# Altium PCB Microcontroller.PcbDoc
Units mm, origin at the board's own origin, x right, y up, seen from the top; angles counter-clockwise.
Board outline 26 x 30 mm, 2 copper layers (F.Cu, B.Cu); 34 components, 38 nets, 165 pads, 110 vias.
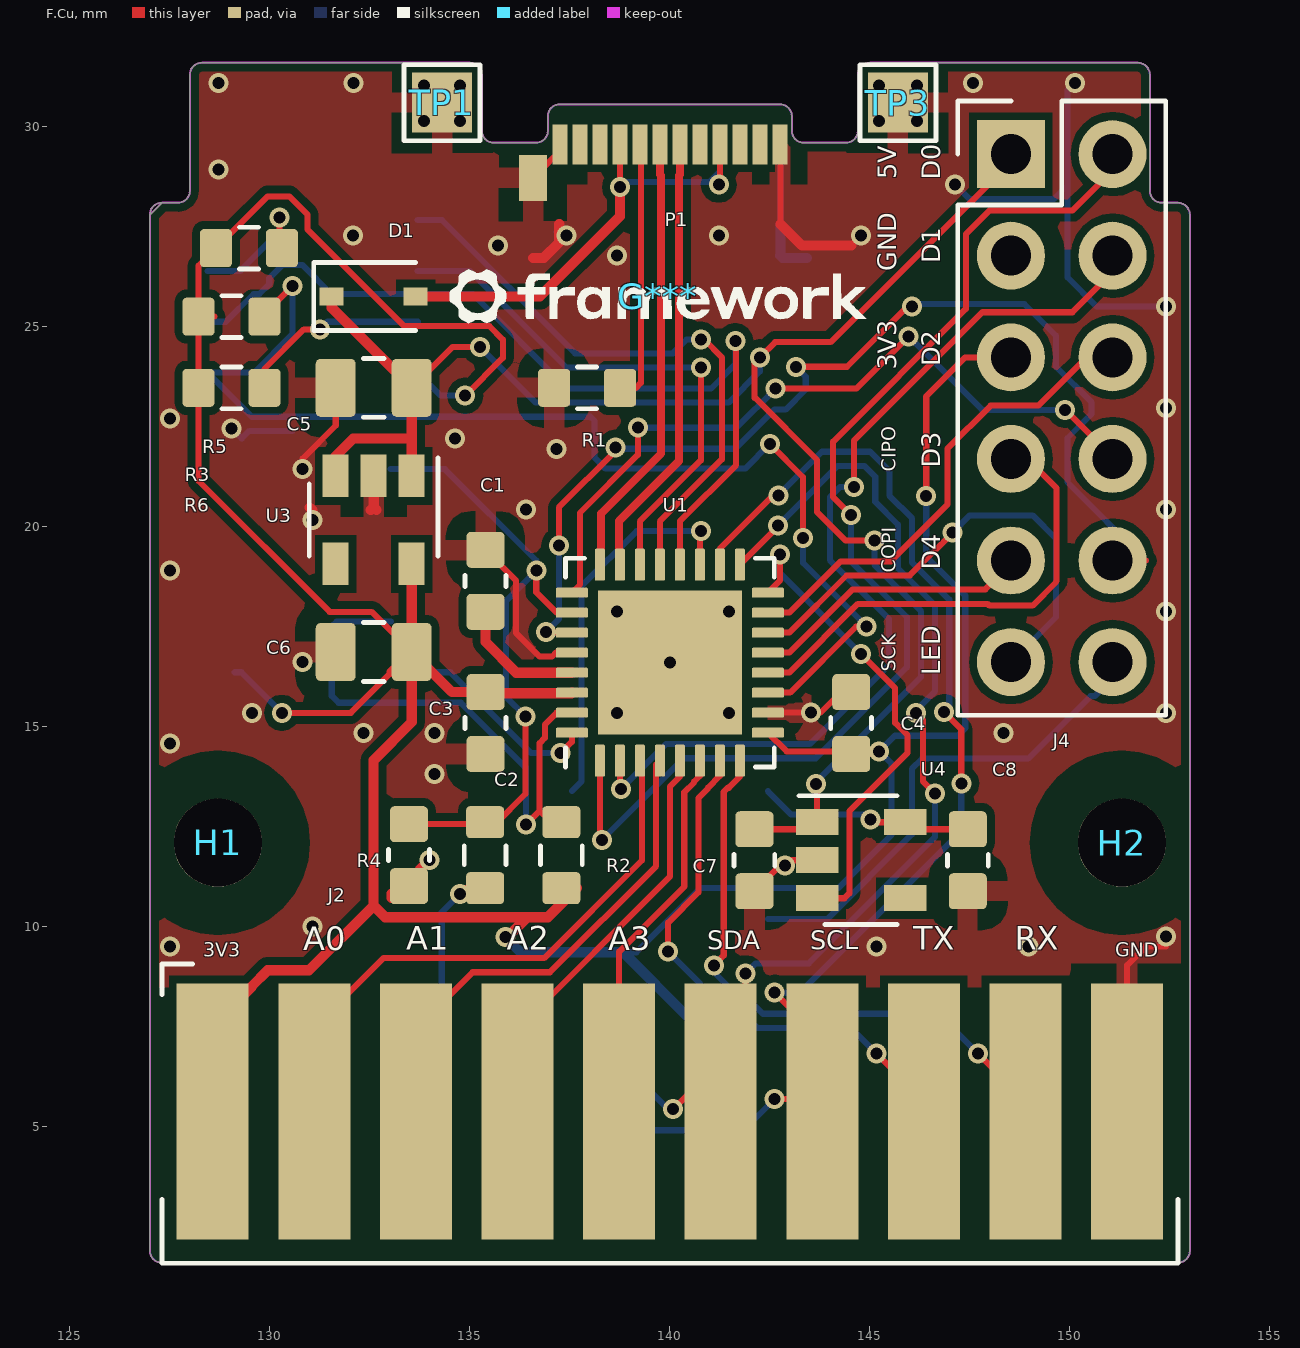
[diagram p0: F.Cu view]
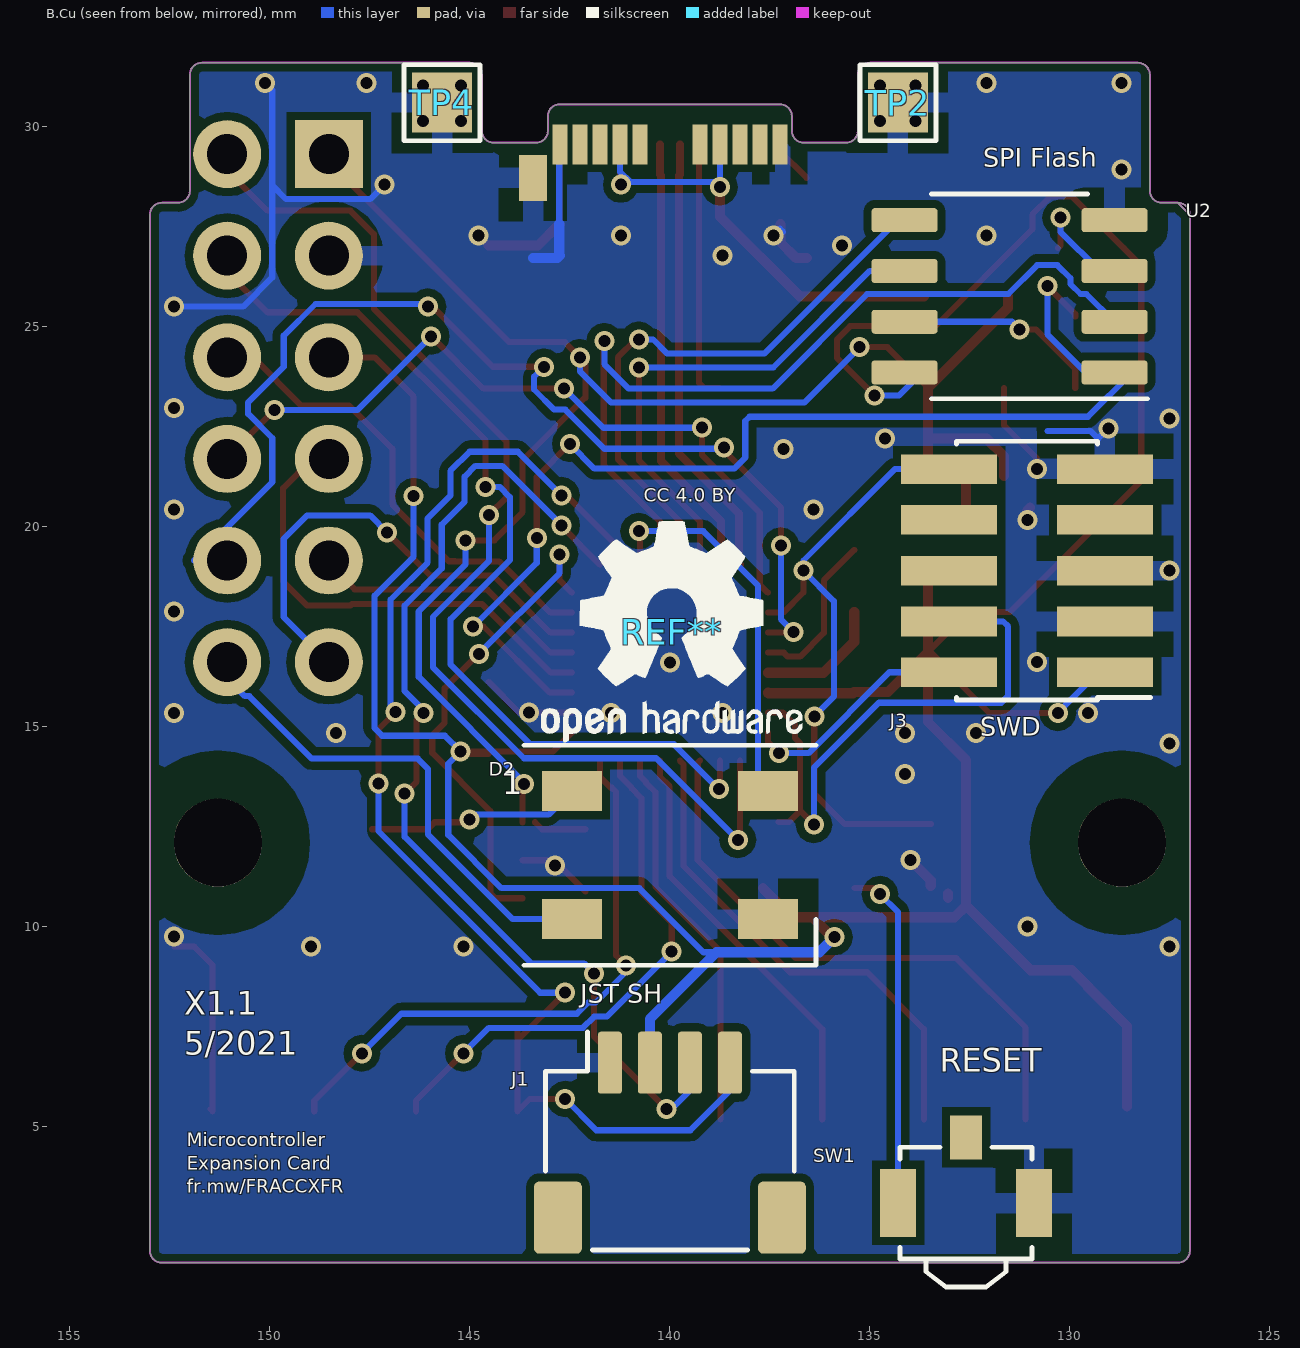
[diagram p1: B.Cu view, seen from below]

## Layer stack, top to bottom
F.Mask: solder mask 0.0102, Solder Resist, Dk 3.5
F.Cu: signal copper 0.0356
Dielectric 1: dielectric 0.32, FR-4, Dk 4.8
B.Cu: signal copper 0.0356
B.Mask: solder mask 0.0102, Solder Resist, Dk 3.5

## Board outline
127.3,28.086 ccw(c127.3,27.786) 127,27.786 127,1.886 ccw(c127.3,1.886) 127.3,1.586 152.7,1.586 ccw(c152.7,1.886) 153,1.886 153,27.786 ccw(c152.7,27.786) 152.3,28.086 cw(c152.3,28.386) 152,28.386 152,31.286 ccw(c151.7,31.286) 151.7,31.586 145,31.586 ccw(c145,31.286) 144.7,31.286 144.7,29.886 cw(c144.4,29.886) 144.3,29.586 143.35,29.586 cw(c143.35,29.886) 143.05,29.886 143.05,30.246 ccw(c142.75,30.246) 142.75,30.546 137.25,30.546 ccw(c137.25,30.246) 136.95,30.246 136.95,29.886 cw(c136.65,29.886) 136.65,29.586 135.7,29.586 135.6,29.586 cw(c135.6,29.886) 135.3,29.886 135.3,31.286 ccw(c135,31.286) 135,31.586 128.3,31.586 ccw(c128.3,31.286) 128,31.286 128,28.386 cw(c127.7,28.386) 127.7,28.086 127.3,28.086 ccw(c127.3,27.786) 127.3,28.086

## Design rules (kind name [scope] priority, off if disabled: settings)
Clearance "Clearence 1.2_PadClass" [InPadClass('Pad Class Clearance 1.2')] p1: gap=1.2 ignorepadtopadclearanceinfootprint=FALSE
Clearance "Clearence 0.2_NetClass" [InNetClass('Default')] p2: gap=0.2 ignorepadtopadclearanceinfootprint=FALSE
Clearance "Clearence 0.1524_Polygon" [InNamedPolygon('B.Cu-GND') OR InNamedPolygon('F.Cu-GND')] p3: gap=0.152 ignorepadtopadclearanceinfootprint=FALSE
HoleSize "Hole Size (Default)" [All] p1: absolutevalues=TRUE maxlimit=10 minlimit=0 maxpercent=80.000 minpercent=20.000
MinimumSolderMaskSliver [All] p1: minsoldermaskwidth=0
PolygonConnect Polygon_F.Cu-GND_ConnectDirect [IsNamedPolygon('F.Cu-GND') vs IsVia] p1: connectstyle=Direct reliefconductorwidth=0.254 reliefentries=4 polygonreliefangle="90 Angle" airgapwidth=0.254
PolygonConnect Polygon_F.Cu-GND_ConnectRelief45 [IsNamedPolygon('F.Cu-GND') vs (IsThruPin or IsSMTPin) and (PadShape_AllLayers = 'Round')] p2: connectstyle=Relief reliefconductorwidth=0.508 reliefentries=4 polygonreliefangle="45 Angle" airgapwidth=0.508
PolygonConnect Polygon_F.Cu-GND_ConnectRelief90 [IsNamedPolygon('F.Cu-GND') vs (IsThruPin or IsSMTPin) and (PadShape_AllLayers <> 'Round')] p3: connectstyle=Relief reliefconductorwidth=0.508 reliefentries=4 polygonreliefangle="90 Angle" airgapwidth=0.508
PolygonConnect Polygon_B.Cu-GND_ConnectDirect [IsNamedPolygon('B.Cu-GND') vs IsVia] p4: connectstyle=Direct reliefconductorwidth=0.254 reliefentries=4 polygonreliefangle="90 Angle" airgapwidth=0.254
PolygonConnect Polygon_B.Cu-GND_ConnectRelief45 [IsNamedPolygon('B.Cu-GND') vs (IsThruPin or IsSMTPin) and (PadShape_AllLayers = 'Round')] p5: connectstyle=Relief reliefconductorwidth=0.508 reliefentries=4 polygonreliefangle="45 Angle" airgapwidth=0.508
PolygonConnect Polygon_B.Cu-GND_ConnectRelief90 [IsNamedPolygon('B.Cu-GND') vs (IsThruPin or IsSMTPin) and (PadShape_AllLayers <> 'Round')] p6: connectstyle=Relief reliefconductorwidth=0.508 reliefentries=4 polygonreliefangle="90 Angle" airgapwidth=0.508
RoutingVias [All] p1: holewidth=0.711 width=1.27 viastyle="Through Hole" minholewidth=0.711 minwidth=1.27 maxholewidth=0.711 maxwidth=1.27
SilkToSilkClearance [All] p1: silktosilkclearance=0
SilkToSolderMaskClearance [IsPad] p1: minsilkscreentomaskgap=0 clearancetoexposedcopper=TRUE
SolderMaskExpansion [All] p1: expansion=0.102 istentingtop=FALSE
Width [All] p1: maxlimit=10 minlimit=0.152 preferedwidth=0.25 minimp=50.000000 maximp=50.000000 favimp=50.000000
26 further rules are at their usual default settings.

## Classes and differential pairs
pad class "Pad Class Clearance 1.2": H1-Un1 H2-Un1
net class Default: +3.6V +3V3 A0 A1 A2 A3 CIPO COPI D0 D1 D2 D3 D4 FLASH_CIPO FLASH_CLK FLASH_COPI FLASH_CS GND LED_EN LED_IN LED_OUT Net-(C1-Pad1) Net-(C2-Pad1) Net-(D1-Pad2) Net-(P1-PadA5) Net-(R4-Pad1) Net-(R5-Pad2) Net-(R6-Pad2) RX_A7 SCK SCL SDA SWCLK SWDIO TX_A6 USB_DN USB_DP VBUS

## Components (designator, comment, footprint, x,y, rotation, side; value= is the part's Value field where it differs from the comment)
C1 "1uF" C_0603_1608Metric 135.39,18.632 r90 top
C2 "100nF" C_0603_1608Metric 133.477,11.774 r270 top
C3 "100nF" C_0603_1608Metric 135.39,15.076 r270 top
C4 "100nF" C_0603_1608Metric 144.534,15.076 r90 top
C5 "10uF" C_0805_2012Metric 132.596,23.458 r180 top
C6 "10uF" C_0805_2012Metric 132.596,16.854 r180 top
C7 "1uF" C_0603_1608Metric 142.113,11.647 r270 top
C8 "1uF" C_0603_1608Metric 147.447,11.647 r270 top
D1 "BAT20JFILM" D_SOD-323 132.596,25.744 r0 top
D2 "WS2812B" LED_WS2812B_PLCC4_5.0x5.0mm_P3.2mm 140,11.774 r0 bottom
G*** "LOGO" Framework-Logo_1.5mm_SilkScreen 139.7,25.744 r0 top
H1 "MountingHole" MountingHole_2.2mm_M2 128.7,12.086 r0 top
H2 "MountingHole" MountingHole_2.2mm_M2 151.3,12.086 r0 top
J1 "JST SH 1x4" JST_SH_SM04B-SRSS-TB_1x04-1MP_P1.00mm_Horizontal 140,4.586 r0 bottom
J2 "Conn_01x10" PinSocket_8FM-78-0010-02-146_1x10_P2.54mm_Horizontal_SMD 140,5.37 r0 top
J3 "Conn_ARM_JTAG_SWD_10" PinHeader_2x05_P1.27mm_Vertical_SMD 131.072,18.886 r180 bottom
J4 "Conn_02x06_Odd_Even" PinHeader_2x06_P2.54mm_Vertical 148.526,29.3 r0 top
P1 "USB_C_Plug_USB2.0" USB_C_Plug_Molex_105444 140,29.586 r0 top
R1 "5.1k" R_0603_1608Metric 137.93,23.458 r180 top
R2 "1k" R_0603_1608Metric 137.287,11.774 r90 top
R3 "5.1k" R_0603_1608Metric 129.04,25.236 r0 top
R4 "5.1k" R_0603_1608Metric 135.382,11.774 r90 top
R5 "5.1k" R_0603_1608Metric 129.476,26.95 r0 top
R6 "5.1k" R_0603_1608Metric 129.04,23.458 r0 top
REF** "OSHW-Logo2_7.3x6mm_SilkScreen" OSHW-Logo2_7.3x6mm_SilkScreen 139.954,17.362 r0 bottom
SW1 "RESET" SW_SPST_B3U-3100P 132.596,3.9 r180 bottom
TP1 "TestPoint" TestPoint_Pad_1.5x1.5mm 134.3,30.586 r0 top
TP2 "TestPoint" TestPoint_Pad_1.5x1.5mm 134.3,30.586 r0 bottom
TP3 "TestPoint" TestPoint_Pad_1.5x1.5mm 145.7,30.586 r0 top
TP4 "TestPoint" TestPoint_Pad_1.5x1.5mm 145.7,30.586 r0 bottom
U1 "ATSAMD21E18A-M" QFN-32-1EP_5x5mm_P0.5mm_EP3.6x3.6mm 140,16.586 r90 top
U2 "GD25Q16CT" SOP-8_3.9x4.9mm_P1.27mm 131.508,25.744 r180 bottom
U3 "AP2112K-3.3" SOT-23-5 132.596,20.156 r270 top
U4 "TLV70036_SOT23-5" SOT-23-5 144.78,11.647 r0 top

## Footprints (in the part's own frame and the unit in brackets; to place one, negate y for a bottom-side part, rotate by r counter-clockwise, add the part's x,y. Pads: shape width x height; smd on the part's side, far side on the other; paste and mask are expansions set on the pad)
C_0603_1608Metric [mm]
  rrect25% 0.9x0.95 smd mask+0: 1(-0.775,0) 2(0.775,0)
  silkscreen extent -0.14,-0.51 0.14,0.51
C_0805_2012Metric [mm]
  rrect25% 1x1.45 smd mask+0: 1(-0.95,0) 2(0.95,0)
  silkscreen extent -0.26,-0.73 0.26,0.73
D_SOD-323 [mm]
  rect 0.6x0.45 smd mask+0: 1(-1.05,0) 2(1.05,0)
  silkscreen extent -1.5,-0.85 1.05,0.85
Framework-Logo_1.5mm_SilkScreen [mm]
  silkscreen extent -5.21,-0.68 5.21,0.68
JST_SH_SM04B-SRSS-TB_1x04-1MP_P1.00mm_Horizontal [mm]
  rrect25% 0.6x1.55 smd mask+0: 1(1.5,-2) 2(0.5,-2) 3(-0.5,-2) 4(-1.5,-2)
  rrect21% 1.2x1.8 smd mask+0: MP(-2.8,1.875) MP(2.8,1.875)
  silkscreen extent -3.11,-2.78 3.11,2.69
LED_WS2812B_PLCC4_5.0x5.0mm_P3.2mm [mm]
  rect 1.5x1 smd mask+0: 1(2.45,-1.6) 2(2.45,1.6) 3(-2.45,1.6) 4(-2.45,-1.6)
  silkscreen extent -3.65,-2.75 3.65,2.75
MountingHole_2.2mm_M2 [mm]
  round 2.2 hole 2.2 paste-2539.97 mask+0: Un1(0,0)
OSHW-Logo2_7.3x6mm_SilkScreen [mm]
  silkscreen extent -3.27,-2.76 3.27,2.77
PinHeader_2x05_P1.27mm_Vertical_SMD [mm]
  rect 2.4x0.74 smd mask+0: 1(1.95,-2.54) 2(-1.95,-2.54) 3(1.95,-1.27) 4(-1.95,-1.27) 5(1.95,0) 6(-1.95,0) 7(1.95,1.27) 8(-1.95,1.27) 9(1.95,2.54) 10(-1.95,2.54)
  silkscreen extent -1.77,-3.23 3.09,3.23
PinHeader_2x06_P2.54mm_Vertical [mm]
  rect 1.7x1.7 hole 1 paste-2539.97 mask+0: 1(0,0)
  rrect100% 1.7x1.7 hole 1 paste-2539.97 mask+0: 2(2.54,0) 3(0,-2.54) 4(2.54,-2.54) 5(0,-5.08) 6(2.54,-5.08) 7(0,-7.62) 8(2.54,-7.62) 9(0,-10.16) 10(2.54,-10.16) 11(0,-12.7) 12(2.54,-12.7)
  silkscreen extent -1.33,-14.03 3.87,1.33
PinSocket_8FM-78-0010-02-146_1x10_P2.54mm_Horizontal_SMD [mm]
  rect 1.8x6.4 smd mask+0: 1(-11.43,0) 2(-8.89,0) 3(-6.35,0) 4(-3.81,0) 5(-1.27,0) 6(1.27,0) 7(3.81,0) 8(6.35,0) 9(8.89,0) 10(11.43,0)
  silkscreen extent -12.7,-3.8 12.7,3.68
QFN-32-1EP_5x5mm_P0.5mm_EP3.6x3.6mm [mm]
  rrect25% 0.8x0.25 smd mask+0: 1(-2.45,1.75) 2(-2.45,1.25) 3(-2.45,0.75) 4(-2.45,0.25) 5(-2.45,-0.25) 6(-2.45,-0.75) 7(-2.45,-1.25) 8(-2.45,-1.75) 17(2.45,-1.75) 18(2.45,-1.25) 19(2.45,-0.75) 20(2.45,-0.25) 21(2.45,0.25) 22(2.45,0.75) 23(2.45,1.25) 24(2.45,1.75)
  rrect25% 0.25x0.8 smd mask+0: 9(-1.75,-2.45) 10(-1.25,-2.45) 11(-0.75,-2.45) 12(-0.25,-2.45) 13(0.25,-2.45) 14(0.75,-2.45) 15(1.25,-2.45) 16(1.75,-2.45) 25(1.75,2.45) 26(1.25,2.45) 27(0.75,2.45) 28(0.25,2.45) 29(-0.25,2.45) 30(-0.75,2.45) 31(-1.25,2.45) 32(-1.75,2.45)
  rect 3.6x3.6 smd paste-3.6 mask+0: 33(0,0)
  rrect25% 0.97x0.97 on Top Paste mask-0.97: Un1(1.2,-1.2) Un2(1.2,0) Un3(1.2,1.2) Un4(0,-1.2) Un5(0,0) Un6(0,1.2) Un7(-1.2,-1.2) Un8(-1.2,0) Un9(-1.2,1.2)
  silkscreen extent -2.61,-2.61 2.61,2.61
R_0603_1608Metric [mm]
  rrect25% 0.8x0.95 smd mask+0: 1(-0.825,0) 2(0.825,0)
  silkscreen extent -0.24,-0.52 0.24,0.52
SOP-8_3.9x4.9mm_P1.27mm [mm]
  rrect25% 1.65x0.6 smd mask+0: 1(2.625,-1.905) 2(2.625,-0.635) 3(2.625,0.635) 4(2.625,1.905) 5(-2.625,1.905) 6(-2.625,0.635) 7(-2.625,-0.635) 8(-2.625,-1.905)
  silkscreen extent -1.95,-2.56 3.45,2.56
SOT-23-5 [mm]
  rect 1.06x0.65 smd mask+0: 1(-1.1,0.95) 2(-1.1,0) 3(-1.1,-0.95) 4(1.1,-0.95) 5(1.1,0.95)
  silkscreen extent -1.55,-1.61 0.9,1.61
SW_SPST_B3U-3100P [mm]
  rect 0.9x1.7 smd mask+0: 1(1.7,-0.82) 2(-1.7,-0.82)
  rect 0.8x1.1 smd mask+0: 3(0,0.82)
  silkscreen extent -1.65,-2.92 1.65,0.57
TestPoint_Pad_1.5x1.5mm [mm]
  rect 1.5x1.5 smd paste-1.5 mask+0: 1(0,0)
  silkscreen extent -0.95,-0.95 0.95,0.95
USB_C_Plug_Molex_105444 [mm]
  rect 0.38x1 smd mask+0: A1(-2.75,-0.04) A2(-2.25,-0.04) A3(-1.75,-0.04) A4(-1.25,-0.04) A5(-0.75,-0.04) A6(-0.25,-0.04) A7(0.25,-0.04) A8(0.75,-0.04) A9(1.25,-0.04) A10(1.75,-0.04) A11(2.25,-0.04) A12(2.75,-0.04)
  rect 0.38x1 smd far side mask+0: B1(2.75,-0.04) B2(2.25,-0.04) B3(1.75,-0.04) B4(1.25,-0.04) B5(0.75,-0.04) B8(-0.75,-0.04) B9(-1.25,-0.04) B10(-1.75,-0.04) B11(-2.25,-0.04) B12(-2.75,-0.04)
  rect 0.7x1.15 smd mask+0: S1(-3.42,-0.88)
  rect 0.7x1.15 smd far side mask+0: S1(3.42,-0.88)

## Part data
C1 C2 C3 C4 C7 C8: library part C_0603_1608Metric, "Capacitor SMD 0603 (1608 Metric), square (rectangular) end terminal, IPC_7351 nominal, (Body size source: IPC-SM-782 page 76, https://www.pcb-3d.com/wordpress/wp-content/uploads/ipc-sm-782a_amendment_1_and_2.pdf), generated with kicad-footprint-generator"
C5 C6: library part C_0805_2012Metric, "Capacitor SMD 0805 (2012 Metric), square (rectangular) end terminal, IPC_7351 nominal, (Body size source: IPC-SM-782 page 76, https://www.pcb-3d.com/wordpress/wp-content/uploads/ipc-sm-782a_amendment_1_and_2.pdf, https://docs.google.com/spreadsheets/d/1BsfQQcO9C6DZCsRaXUlFlo91Tg2WpOkGARC1WS5S8t0/edit?usp=sharing), generated with kicad-footprint-generator"
D1: library part D_SOD-323, "SOD-323"
D2: library part LED_WS2812B_PLCC4_5.0x5.0mm_P3.2mm, "https://cdn-shop.adafruit.com/datasheets/WS2812B.pdf"
G***: library part Framework-Logo_1.5mm_SilkScreen
H1 H2: library part MountingHole_2.2mm_M2, "Mounting Hole 2.2mm, no annular, M2"
J1: library part JST_SH_SM04B-SRSS-TB_1x04-1MP_P1.00mm_Horizontal, "JST SH series connector, SM04B-SRSS-TB (http://www.jst-mfg.com/product/pdf/eng/eSH.pdf), generated with kicad-footprint-generator"
J2: library part PinSocket_8FM-78-0010-02-146_1x10_P2.54mm_Horizontal_SMD
J3: library part PinHeader_2x05_P1.27mm_Vertical_SMD, "surface-mounted straight pin header, 2x05, 1.27mm pitch, double rows"
J4: library part PinHeader_2x06_P2.54mm_Vertical, "Through hole straight pin header, 2x06, 2.54mm pitch, double rows"
P1: library part USB_C_Plug_Molex_105444, "Universal Serial Bus (USB) Shielded I/O Plug, Type C, Right Angle, Surface Mount, http://www.molex.com/pdm_docs/sd/1054440001_sd.pdf"
R1 R2 R3 R4 R5 R6: library part R_0603_1608Metric, "Resistor SMD 0603 (1608 Metric), square (rectangular) end terminal, IPC_7351 nominal, (Body size source: IPC-SM-782 page 72, https://www.pcb-3d.com/wordpress/wp-content/uploads/ipc-sm-782a_amendment_1_and_2.pdf), generated with kicad-footprint-generator"
REF**: "Open Source Hardware Symbol"
SW1: library part SW_SPST_B3U-3100P, "Ultra-small-sized Tactile Switch with High Contact Reliability, Side-actuated Model, with Ground Terminal, without Boss"
TP1 TP2 TP3 TP4: library part TestPoint_Pad_1.5x1.5mm, "SMD rectangular pad as test Point, square 1.5mm side length"
U1: library part QFN-32-1EP_5x5mm_P0.5mm_EP3.6x3.6mm, "QFN, 32 Pin (http://infocenter.nordicsemi.com/pdf/nRF52810_PS_v1.1.pdf#page=468), generated with kicad-footprint-generator ipc_noLead_generator.py"
U2: library part SOP-8_3.9x4.9mm_P1.27mm, "SOP, 8 Pin (http://www.macronix.com/Lists/Datasheet/Attachments/7534/MX25R3235F,%20Wide%20Range,%2032Mb,%20v1.6.pdf#page=79), generated with kicad-footprint-generator ipc_gullwing_generator.py"
U3 U4: library part SOT-23-5, "5-pin SOT23 package"

## Via types
v1: diameter 0.5, hole 0.3, F.Cu to B.Cu, tented both sides, 110 vias

## Nets (pads, with @x,y where several pads share a name; then routed paths per layer and width w, separated by ;. In a path a pad name is that pad's centre, name@x,y a point inside that pad or via, vN(x,y) a via of type N, cw(c..) or ccw(c..) an arc to the next point about the centre after c; other vN are vias at no path point)
+3.6V: C8.1 D2.1 U4.5 | length 5.4
  F.Cu w0.152: v1(145.014,12.661) 145.078,12.597 U4.5 146.055,12.422 C8.1
  B.Cu w0.152: D2.1 143.034,12.79 144.885,12.79 v1(145.014,12.661)
+3V3: C3.1 C4.1 C6.1 J1.2 J2.1 J3.1 J4.5 R2.1 R3.1 R5.1 R6.1 U1.9 U1.30 U2.8 U3.5 | length 96.5
  F.Cu w0.152: R3.1@128.615,25.236 R3.1 ; v1(130.302,15.33) 132.022,15.33 C6.1 132.545,17.855 131.495,17.855 128.215,21.135 R6.1 R3.1 ; v1(134.882,23.261) 135.826,24.206 135.826,24.664 135.491,25 133.359,25 130.937,27.423 130.937,27.793 130.491,28.239 129.94,28.239 R5.1 128.215,26.514 R3.1 ; U1.9 142.917,14.369 v1(145.233,14.369) 145.166,14.301 C4.1 ; v1(146.408,20.75) 146.408,23.245 147.383,24.22 J4.5@148.936,24.22
  F.Cu w0.254: J2.1@128.57,5.497 128.57,7.502 129.54,8.472 129.54,8.489 129.948,8.897 130.977,8.897 132.593,10.513 ; C6.1@133.047,16.355 C6.1 ; U3.5 C6.1 ; 133.641,10.222 136.434,10.222 ; v1(135.89,9.725) 135.937,9.725 136.434,10.222 ; U1.30 137.537,15.823 135.418,15.823 C3.1 134.549,15.851 C6.1 ; R2.1@137.676,10.949 136.949,10.222 136.553,10.222 ; 132.593,10.513 132.593,14.149 133.546,15.102 C6.1 ; 132.593,10.513 132.884,10.222 136.553,10.222 ; 136.434,10.222 136.553,10.222
  B.Cu w0.152: J3.1 129.286,16.346 v1(130.302,15.33) ; U2.8@133.697,23.839 134.275,23.261 v1(134.882,23.261) ; 138.833,9.347 139.161,9.347 140.764,10.95 144.21,10.95 145.542,12.282 145.542,14.06 v1(145.233,14.369) 145.623,14.758 147.193,14.758 147.383,14.949 147.383,18.261 146.408,19.236 v1(146.408,20.75)
  B.Cu w0.254: v1(135.89,9.725) 136.14,9.475 136.268,9.347 138.833,9.347 140.5,7.68 J1.2@140.5,6.662
A0: J2.2 U1.3 | length 14.7
  F.Cu w0.152: J2.2@131.11,5.17 131.11,7.47 132.839,9.199 136.854,9.199 139.302,11.647 139.302,14.084 U1.3
A1: J2.3 U1.4 | length 12.6
  F.Cu w0.152: J2.3@133.65,5.17 133.65,7.427 135.069,8.846 137,8.846 139.655,11.501 139.655,14.041 U1.4
A2: J2.4 U1.5 | length 12.6
  F.Cu w0.152: J2.4@136.19,5.17 J2.4@136.19,7.318 ; J2.4 136.19,7.427 140.007,11.244 140.007,13.493 140.25,13.736 U1.5
A3: J2.5 U1.6 | length 9.8
  F.Cu w0.152: J2.5@138.73,5.17 138.73,9.359 140.36,10.989 140.36,13.347 140.602,13.59 140.602,13.609 140.75,13.757 U1.6
CIPO: J4.7 U1.12 | length 11.6
  F.Cu w0.152: U1.12 142.983,16.336 144.701,18.054 147.939,18.054 147.942,18.057 147.986,18.014 149.067,18.014 149.653,18.599 149.653,18.615 149.669,18.632 149.669,20.946 J4.7@148.936,21.68
COPI: J4.9 U1.13 | length 7.4
  F.Cu w0.152: U1.13 142.985,16.836 144.562,18.413 145.655,18.413 145.659,18.417 147.884,18.417 148.607,19.14 J4.9@148.936,19.14
D0: J4.2 U1.1 | length 29.3
  F.Cu w0.152: U1.1 138.25,12.208 v1(138.303,12.155) ; v1(144.526,20.283) 144.082,20.727 144.082,22.115 147.4,25.434 147.4,27.301 147.986,27.886 150.062,27.886 J4.2@151.476,29.3
  B.Cu w0.152: v1(138.303,12.155) 140.345,14.197 143.647,14.197 145.923,16.473 145.923,17.728 144.526,19.125 v1(144.526,20.283)
D1: J4.4 U1.2 | length 24.2
  F.Cu w0.152: U1.2 138.75,13.451 v1(138.776,13.425) ; v1(144.608,20.981) 144.608,22.143 147.811,25.346 150.062,25.346 J4.4@151.476,26.76
  B.Cu w0.152: v1(138.776,13.425) 139.901,14.55 143.492,14.55 145.48,16.538 145.48,17.672 144,19.152 144,20.727 144.254,20.981 v1(144.608,20.981)
D2: J4.6 U1.15 | length 12.5
  F.Cu w0.152: U1.15 142.988,17.836 144.27,19.118 145.363,19.118 145.367,19.122 145.524,19.122 146.939,20.537 146.939,21.934 148.018,23.013 149.21,23.013 150.417,24.22 J4.6@151.476,24.22
D3: J4.8 U1.25 | length 19
  F.Cu w0.152: U1.25 137.753,18.539 137.753,20.333 139.2,21.779 v1(139.2,22.46) ; v1(142.641,23.438) 144.66,23.438 v1(145.968,24.746) ; v1(149.882,22.906) 151.108,21.68 J4.8@151.138,21.68
  B.Cu w0.152: v1(139.2,22.46) 141.664,22.46 v1(142.641,23.438) ; v1(145.968,24.746) 147.808,22.906 v1(149.882,22.906)
D4: J4.10 U1.27 | length 27.3
  F.Cu w0.152: v1(136.907,17.355) 136.927,17.336 U1.27 ; v1(137.227,19.512) 137.227,20.469 138.642,21.884 v1(138.642,21.966) ; v1(143.147,23.984) 144.428,23.984 145.934,25.49 v1(146.05,25.49) ; J4.10@151.198,19.14 J4.10@151.9,19.14
  B.Cu w0.152: v1(136.907,17.355) 137.227,17.675 v1(137.227,19.512) ; v1(138.642,21.966) 138.674,21.934 141.636,21.934 142.613,22.912 142.894,22.912 143.397,23.415 143.397,23.734 v1(143.147,23.984) ; v1(146.05,25.49) 146.113,25.553 148.86,25.553 149.653,24.761 149.653,23.984 150.543,23.094 150.543,22.806 149.94,22.204 149.94,21.1 J4.10@151.9,19.14
FLASH_CIPO: U1.20 U2.2 | length 22.1
  F.Cu w0.152: U1.20 140.25,20.121 141.654,21.525 141.654,24.61 v1(141.638,24.626)
  B.Cu w0.152: U2.2@128.447,25.109 128.896,25.109 129.59,25.803 129.735,25.803 129.985,26.052 129.985,26.197 130.311,26.524 130.817,26.524 131.538,25.803 135.069,25.803 137.432,23.44 141.028,23.44 141.638,24.05 v1(141.638,24.626)
FLASH_CLK: U1.22 U2.6 | length 13.6
  F.Cu w0.152: U1.22 139.25,20.118 140.775,21.643 v1(140.775,23.966)
  B.Cu w0.152: U2.6@133.697,26.379 135.001,26.379 137.414,23.966 v1(140.775,23.966)
FLASH_COPI: U1.21 U2.5 | length 15.1
  F.Cu w0.152: U1.21 139.75,20.119 141.301,21.671 141.301,24.219 140.854,24.666 v1(140.775,24.666)
  B.Cu w0.152: U2.5@133.697,27.649 134.302,27.649 137.633,24.318 140.074,24.318 140.421,24.666 v1(140.775,24.666)
FLASH_CS: R3.2 U1.11 U2.1 | length 29.3
  F.Cu w0.152: R3.2 129.865,25.299 v1(130.564,25.998) ; U1.11 143.005,15.836 144.66,17.491 v1(144.917,17.491) ; v1(142.5,22.055) 143.328,21.227 v1(143.328,19.699)
  B.Cu w0.152: v1(130.564,25.998) 130.564,24.8 129.603,23.839 128.447,23.839 129.551,22.735 138.009,22.735 138.116,22.628 138.116,21.713 138.39,21.439 141.885,21.439 v1(142.5,22.055) ; v1(143.328,19.699) 143.328,19.08 v1(144.917,17.491)
GND: C1.2 C2.2 C3.2 C4.2 C5.2 C6.2 C7.2 C8.2 D2.3 J1.1 J2.10 J3.3 J3.5 J3.9 J4.3 P1.A1 P1.A12 P1.B1 P1.B12 P1.S1 R1.2 SW1.1 TP1.1 TP2.1 TP3.1 TP4.1 U1.10 U1.28 U1.33 U2.4 U3.2 U4.2 | length 42.6
  F.Cu w0.152: v1(130.818,21.426) 130.818,21.688 131.646,22.516 C5.2 ; C1.2 136.152,18.645 136.152,17.332 136.745,16.739 137.053,16.739 137.15,16.836 U1.28 ; P1.S1@136.58,28.706 137.25,29.376 P1.A1 P1.A1@137.233,29.529 ; C7.2 142.761,11.52 v1(142.875,11.52) 143.002,11.647 U4.2 ; U1.10 v1(143.524,15.336) 143.765,15.336 C4.2@144.534,16.105 ; P1.A12 142.767,29.529 142.767,27.546 ; J2.10@151.484,5.424 J2.10 151.43,9.026 151.892,9.488 152.4,9.488
  F.Cu w0.254: 130.994,20.464 v1@131.059,20.399 ; 132.523,20.399 132.596,20.472 ; U3.2 132.596,20.472 ; 132.669,20.399 132.596,20.472 ; C2.2@133.047,10.701 C2.2@133.047,10.816 ; C2.2 133.477,11.139 v1(133.985,11.647) ; 136.58,26.706 136.85,26.706 137.233,27.089 137.233,27.546 ; 142.767,27.546 143.299,27.014 144.534,27.014
  B.Cu w0.152: v1(129.04,22.442) 129.29,22.192 129.298,22.192 129.489,22.383 130.564,22.383 ; 137.168,27.358 v1@137.25,27.44 ; P1.B1 142.767,29.529 142.767,27.546 ; v1(147.13,28.538) 147.494,28.174 149.597,28.174 149.94,28.517 149.94,30.896 ; v1(150.122,31.078) 149.94,30.896 ; v1(152.4,25.49) 150.67,25.49 149.94,26.219 149.94,30.896
  B.Cu w0.254: 142.767,27.546 142.767,26.784 142.752,26.77 142.816,26.706 143.42,26.706
  other v1: 127.508,9.488 145.161,9.488 148.971,9.488 152.4,9.742 131.064,9.996 134.12,13.806 127.508,14.568 132.342,14.822 134.12,14.822 148.344,14.822 129.548,15.33 138.684,15.33 141.478,15.33 152.4,15.33 140,16.586 130.818,16.6 138.684,17.87 141.478,17.87 152.4,17.87 127.508,18.886 131.064,20.156 136.406,20.41 152.4,20.41 137.16,21.934 134.628,22.188 127.508,22.696 152.4,22.95 138.684,26.76 135.7,27.014 132.08,27.268 137.414,27.268 141.224,27.268 144.78,27.268 128.714,28.919 133.858,30.125 134.747,30.125 145.225,30.125 146.177,30.125 133.858,31.014 134.747,31.014 145.225,31.014 146.177,31.014 128.714,31.078 132.088,31.078 147.582,31.078
LED_EN: U1.16 U4.3 | length 12.3
  F.Cu w0.152: U1.16 142.756,18.642 v1(142.756,19.296) ; U4.3 144.362,10.697 144.486,10.821 144.486,12.877 145.941,14.332 145.941,14.769 145.631,15.079 145.631,15.949 v1(144.774,16.806)
  B.Cu w0.152: v1(142.756,19.296) 142.756,18.824 v1(144.774,16.806)
LED_IN: D2.4 U1.19 | length 9.6
  F.Cu w0.152: U1.19 140.75,19.85 v1(140.776,19.876)
  B.Cu w0.152: D2.4 137.795,13.619 137.795,18.505 139.166,19.876 v1(140.776,19.876)
LED_OUT: D2.2 J4.12 | length 12.6
  B.Cu w0.152: D2.2 143.932,10.174 146.05,12.292 146.05,13.933 146.304,14.187 148.953,14.187 150.517,15.75 150.626,15.75 J4.12@151.476,16.6
Net-(C1-Pad1): C1.1 U1.29 | length 3.2
  F.Cu w0.254: C1.1 135.39,17.107 136.161,16.336 U1.29
Net-(C2-Pad1): C2.1 J3.10 R4.2 U1.26 | length 15.8
  F.Cu w0.152: C2.1 133.952,12.549 135.632,12.549 136.39,13.307 v1(136.39,15.246) ; v1(136.66,18.886) 136.66,18.347 137.171,17.836 U1.26
  B.Cu w0.152: J3.10 134.374,21.426 136.66,19.14 v1(136.66,18.886) 135.898,18.124 135.898,15.738 v1(136.39,15.246)
Net-(D1-Pad2): D1.2 P1.A4 P1.A9 P1.B4 P1.B9 | length 13.3
  F.Cu w0.152: v1(138.75,28.472) P1.A4 ; v1(141.224,28.538) 141.25,28.564 P1.A9
  F.Cu w0.254: D1.2 136.752,25.744 138.75,27.742 v1(138.75,28.472)
  B.Cu w0.152: P1.B9 138.75,28.85 138.75,28.604 140.904,28.604 ; v1(141.224,28.538) 141.158,28.604 140.904,28.604 ; P1.B4 141.25,28.859 140.995,28.604 140.904,28.604
Net-(P1-PadA5): P1.A5 R1.1 | length 6.5
  F.Cu w0.152: R1.1 139.155,23.458 139.276,23.579 139.276,27.081 139.276,29.52 P1.A5
Net-(R4-Pad1): R4.1 SW1.2 | length 8.6
  F.Cu w0.152: v1(134.747,10.799) 134.897,10.949 R4.1
  B.Cu w0.152: SW1.2 134.296,10.348 v1(134.747,10.799)
Net-(R5-Pad2): R5.2 U2.3 | length 3.3
  F.Cu w0.152: v1(130.238,27.713) 130.238,27.013 R5.2
  B.Cu w0.152: U2.3@128.447,26.379 129.259,26.379 130.238,27.359 v1(130.238,27.713)
Net-(R6-Pad2): R6.2 U2.7 | length 4.8
  F.Cu w0.152: R6.2 129.865,23.933 130.851,24.918 v1(131.255,24.918)
  B.Cu w0.152: v1(131.255,24.918) 131.445,25.109 U2.7@133.697,25.109
RX_A7: J2.9 U1.8 | length 15
  F.Cu w0.152: v1(141.097,9.02) 141.347,9.27 141.347,13.356 141.451,13.46 141.474,13.46 141.75,13.736 U1.8 ; v1(147.7,6.821) 148.89,5.631 J2.9
  B.Cu w0.152: v1(141.097,9.02) 141.097,8.853 141.859,8.091 142.042,8.091 142.325,7.808 146.713,7.808 v1(147.7,6.821)
SCK: J4.11 U1.14 | length 12.2
  F.Cu w0.152: U1.14 142.987,17.336 144.416,18.765 145.509,18.765 145.513,18.769 145.997,18.769 v1(147.066,19.838)
  B.Cu w0.152: v1(147.066,19.838) 147.494,20.266 149.067,20.266 149.653,19.681 149.653,17.726 J4.11
SCL: J1.4 J2.7 U1.18 | length 34.5
  F.Cu w0.152: U1.18 141.25,19.436 142.586,20.772 v1(142.712,20.772) ; v1(142.62,5.678) 143.502,5.678 J2.7 ; v1(142.62,8.335) 143.81,7.145 J2.7 ; J2.7@143.81,7.427 J2.7 ; v1(146.857,15.349) 147.285,14.921 v1(147.285,13.566)
  B.Cu w0.152: J1.4@138.5,6.662 138.5,5.887 139.489,4.898 141.84,4.898 v1(142.62,5.678) ; v1(142.62,8.335) 143.246,8.335 147.285,12.374 v1(147.285,13.566) ; v1(142.712,20.772) 143.801,21.86 145.006,21.86 145.486,21.38 145.486,20.762 146.056,20.192 146.056,19.09 146.984,18.161 146.984,15.476 v1(146.857,15.349)
SDA: J1.3 J2.6 U1.17 | length 26.4
  F.Cu w0.152: v1(140.08,5.424) 141.894,7.238 v1(141.894,8.818) ; U1.17 142.706,19.992 v1(142.706,20.021) ; v1(146.157,15.331) 146.331,15.158 146.331,13.614 v1(146.632,13.313)
  B.Cu w0.152: J1.3@139.5,6.662 139.5,5.887 139.963,5.424 v1(140.08,5.424) ; v1(141.894,8.818) 142.144,9.068 143.471,9.068 146.632,12.229 v1(146.632,13.313) ; v1(142.706,20.021) 144.193,21.508 144.86,21.508 145.134,21.234 145.134,20.608 145.703,20.039 145.703,18.944 146.632,18.015 146.632,15.874 146.157,15.4 v1(146.157,15.331)
SWCLK: J3.4 R2.2 U1.31 | length 14.4
  F.Cu w0.152: v1(136.398,12.536) 136.743,12.881 ; R2.2 137.024,12.599 136.743,12.881 ; U1.31 137.171,15.336 136.874,15.039 136.874,14.708 136.743,14.577 136.743,12.881
  B.Cu w0.152: J3.4 131.67,17.616 131.546,17.492 131.546,15.755 131.717,15.584 134.775,15.584 136.398,13.961 v1(136.398,12.536)
SWDIO: J3.2 U1.32 | length 5.7
  F.Cu w0.152: v1(137.269,14.324) 137.55,14.605 U1.32
  B.Cu w0.152: J3.2 134.511,16.346 136.533,14.324 v1(137.269,14.324)
TX_A6: J2.8 U1.7 | length 13.5
  F.Cu w0.152: v1(139.954,9.361) 139.954,10.085 140.712,10.843 140.712,13.201 140.955,13.444 140.955,13.462 141.25,13.757 U1.7 ; v1(145.161,6.821) 146.35,5.632 J2.8
  B.Cu w0.152: v1(139.954,9.361) 141.576,7.739 141.896,7.739 142.179,7.456 144.526,7.456 v1(145.161,6.821)
USB_DN: P1.A7 U1.23 | length 11.2
  F.Cu w0.2: U1.23 138.725,19.061 138.725,20.125 140.225,21.625 140.225,28.771 140.25,28.796 P1.A7
USB_DP: P1.A6 U1.24 | length 11.2
  F.Cu w0.2: U1.24 138.275,19.061 138.275,20.311 139.775,21.811 139.775,28.771 139.75,28.796 P1.A6
VBUS: C5.1 C7.1 D1.1 J4.1 U3.1 U3.3 U4.1 | length 44.6
  F.Cu w0.152: C5.1 134.562,24.474 v1(135.255,24.474) ; C7.1 143.197,12.422 U4.1@143.372,12.597 ; v1(143.65,13.552) 143.68,13.522 U4.1 ; v1(145.11,19.644) 144.386,19.644 143.68,20.35 143.68,21.653 142.13,23.204 142.113,23.204 142.113,24.085 v1(142.248,24.22) 142.629,24.601 144.018,24.601 148.717,29.3 J4.1@148.936,29.3
  F.Cu w0.254: D1.1 131.546,25.458 C5.1 ; U3.3 131.646,21.754 132.08,22.188 133.546,22.188 C5.1 ; U3.1 C5.1
  B.Cu w0.152: v1(135.255,24.474) 136.642,23.087 141.469,23.087 142.248,23.866 v1(142.248,24.22) ; v1(143.65,13.552) 143.65,13.603 146.279,16.232 146.279,17.869 145.11,19.039 v1(145.11,19.644)
pads on no net: H1.Un1 H2.Un1 J1.MP J3.6 J3.7 J3.8 P1.A2 P1.A3 P1.A8 P1.A10 P1.A11 P1.B2 P1.B3 P1.B5 P1.B8 P1.B10 P1.B11 SW1.3 U1.Un1 U1.Un2 U1.Un3 U1.Un4 U1.Un5 U1.Un6 U1.Un7 U1.Un8 U1.Un9 U3.4 U4.4

## Polygon pours and split planes (outlines as drawn)
GND on B.Cu "B.Cu-GND" (solid, remove dead copper, pour order 0): 135.39,31.586 ccw(c135.39,31.886) 135.39,31.586 144.534,31.586 ccw(c144.534,31.886) 144.534,31.586 152.862,31.586 cw(c152.862,31.286) 153.162,31.286 153.162,1.914 cw(c152.862,1.914) 152.862,1.614 127.3,1.614 cw(c127.3,1.914) 127,1.914 127,31.286 cw(c127.3,31.286) 127.3,31.586
GND on F.Cu "F.Cu-GND" (solid, remove dead copper, pour order 1): 135.136,31.586 ccw(c135.136,31.886) 135.136,31.586 144.788,31.586 ccw(c144.788,31.886) 144.788,31.586 152.862,31.586 cw(c152.862,31.286) 153.162,31.286 153.162,8.772 cw(c152.862,8.772) 152.862,8.472 127.3,8.472 cw(c127.3,8.772) 127,8.772 127,31.286 cw(c127.3,31.286) 127.3,31.586

## Keep-outs
Edge.Cuts:
  lines w0.05: 127,1.886 ccw(c127.3,1.886) 127.3,1.586 ; 127,1.886 ccw(c127.3,1.886) 127.3,1.586 ; 127,1.886 127,27.786 ; 127,1.886 127,27.786 ; 127,27.786 cw(c127.3,27.786) 127.3,28.086 ; 127,27.786 cw(c127.3,27.786) 127.3,28.086 ; 127,27.786 cw(c127.3,27.786) 127.3,28.086 ; 127,27.786 cw(c127.3,27.786) 127.3,28.086 ; 127,27.786 127.3,28.086 ; 127.3,1.586 152.7,1.586 ; 127.3,1.586 152.7,1.586 ; 127.3,28.086 127.7,28.086 ; 127.3,28.086 127.7,28.086 ; 127.7,28.086 ccw(c127.7,28.386) 128,28.386 ; 127.7,28.086 ccw(c127.7,28.386) 128,28.386 ; 128,28.386 128,31.286 ; 128,28.386 128,31.286 ; 128,31.286 cw(c128.3,31.286) 128.3,31.586 ; 128,31.286 cw(c128.3,31.286) 128.3,31.586 ; 128.3,31.586 135,31.586 ; 128.3,31.586 135,31.586 ; 135,31.586 cw(c135,31.286) 135.3,31.286 ; 135,31.586 cw(c135,31.286) 135.3,31.286 ; 135.3,29.886 ccw(c135.6,29.886) 135.6,29.586 ; 135.3,29.886 ccw(c135.6,29.886) 135.6,29.586 ; 135.3,29.886 135.3,31.286 ; 135.3,29.886 135.3,31.286 ; 135.6,29.586 135.7,29.586 ; 135.6,29.586 135.7,29.586 ; 135.6,29.586 135.7,29.586 ; 135.7,29.586 136.65,29.586 ; 135.7,29.586 136.65,29.586 ; 136.65,29.586 ccw(c136.65,29.886) 136.95,29.886 ; 136.65,29.586 ccw(c136.65,29.886) 136.95,29.886 ; 136.95,29.886 136.95,30.246 ; 136.95,29.886 136.95,30.246 ; 136.95,30.246 cw(c137.25,30.246) 137.25,30.546 ; 136.95,30.246 cw(c137.25,30.246) 137.25,30.546 ; 137.25,30.546 142.75,30.546 ; 137.25,30.546 142.75,30.546 ; 142.75,30.546 cw(c142.75,30.246) 143.05,30.246 ; 142.75,30.546 cw(c142.75,30.246) 143.05,30.246 ; 143.05,29.886 ccw(c143.35,29.886) 143.35,29.586 ; 143.05,29.886 ccw(c143.35,29.886) 143.35,29.586 ; 143.05,29.886 143.05,30.246 ; 143.05,29.886 143.05,30.246 ; 143.35,29.586 144.3,29.586 ; 143.35,29.586 144.3,29.586 ; 144.3,29.586 144.4,29.586 ; 144.3,29.586 144.4,29.586 ; 144.3,29.586 144.4,29.586 ; 144.4,29.586 ccw(c144.4,29.886) 144.7,29.886 ; 144.4,29.586 ccw(c144.4,29.886) 144.7,29.886 ; 144.7,29.886 144.7,31.286 ; 144.7,29.886 144.7,31.286 ; 144.7,31.286 cw(c145,31.286) 145,31.586 ; 144.7,31.286 cw(c145,31.286) 145,31.586 ; 145,31.586 151.7,31.586 ; 145,31.586 151.7,31.586 ; 151.7,31.586 cw(c151.7,31.286) 152,31.286 ; 151.7,31.586 cw(c151.7,31.286) 152,31.286 ; 152,28.386 ccw(c152.3,28.386) 152.3,28.086 ; 152,28.386 ccw(c152.3,28.386) 152.3,28.086 ; 152,28.386 152,31.286 ; 152,28.386 152,31.286 ; 152.3,28.086 152.7,28.086 ; 152.3,28.086 152.7,28.086 ; 152.7,1.586 ccw(c152.7,1.886) 153,1.886 ; 152.7,1.586 ccw(c152.7,1.886) 153,1.886 ; 152.7,28.086 cw(c152.7,27.786) 153,27.786 ; 152.7,28.086 cw(c152.7,27.786) 153,27.786 ; 153,1.886 153,27.786 ; 153,1.886 153,27.786

## Silkscreen, mask and mechanical layers (free items; w line width, h text height)
F.SilkS:
  text "5V" at 145.825,28.678 h0.8 r90
  text "D0" at 146.924,28.658 h0.8 r90
  text "D1" at 146.917,26.566 h0.8 r90
  text "GND" at 145.827,26.37 h0.8 r90
  text "D2" at 146.919,23.997 h0.8 r90
  text "3V3" at 145.828,23.909 h0.8 r90
  text "D3" at 146.924,21.462 h0.8 r90
  text "CIPO" at 145.771,21.364 h0.6 r90
  text "D4" at 146.919,18.913 h0.8 r90
  text "COPI" at 145.771,18.83 h0.6 r90
  text "SCK" at 145.771,16.365 h0.6 r90
  text "LED" at 146.917,16.27 h0.8 r90
  text "SDA" at 140.933,9.259 h0.8
  text "SCL" at 143.513,9.259 h0.8
  text "TX" at 146.081,9.209 h1
  text "RX" at 148.62,9.209 h1
  text "A0" at 130.831,9.201 h1
  text "A1" at 133.413,9.207 h1
  text "A2" at 135.917,9.206 h1
  text "A3" at 138.463,9.201 h1
  text "3V3" at 128.336,9.115 h0.6
  text "GND" at 151.137,9.115 h0.6
B.SilkS:
  text "SPI Flash" at 132.16,28.818 h0.8
  text "CC 4.0 BY" at 140.653,20.497 h0.58
  text "SWD" at 132.235,14.595 h0.8
  text "JST SH" at 142.24,7.927 h0.8
  text "X1.1 / 5/2021" at 152.146,6.581 h1
  text "RESET" at 133.258,6.155 h1
  text "Microcontroller / Expansion Card / fr.mw/FRACCXFR" at 152.082,3.218 h0.58

## Text inside footprints (layer, text, board x,y; h text height)
D2: B.SilkS "1" at 144.186,13.097 h1
P1: Dwgs.User "PCB Edge" at 139.444,30.355 h0.5